# EAGLE board wr841n-pic (EAGLE 6.5.0)
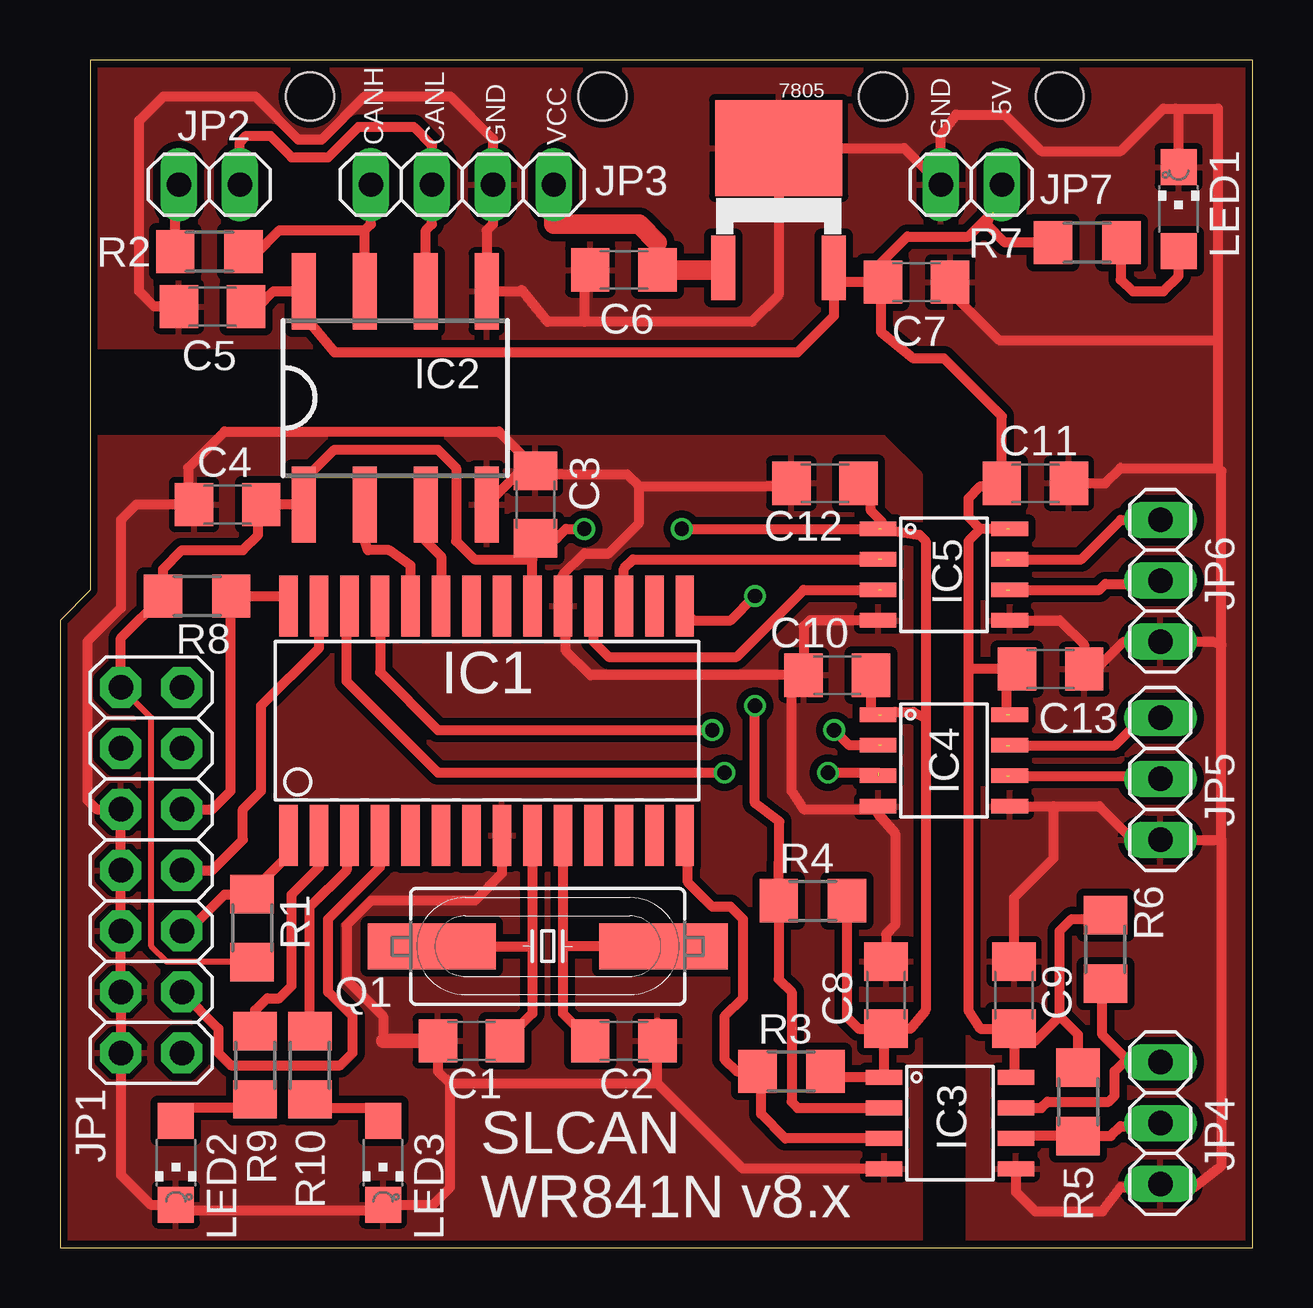
[diagram p0: board, top side]
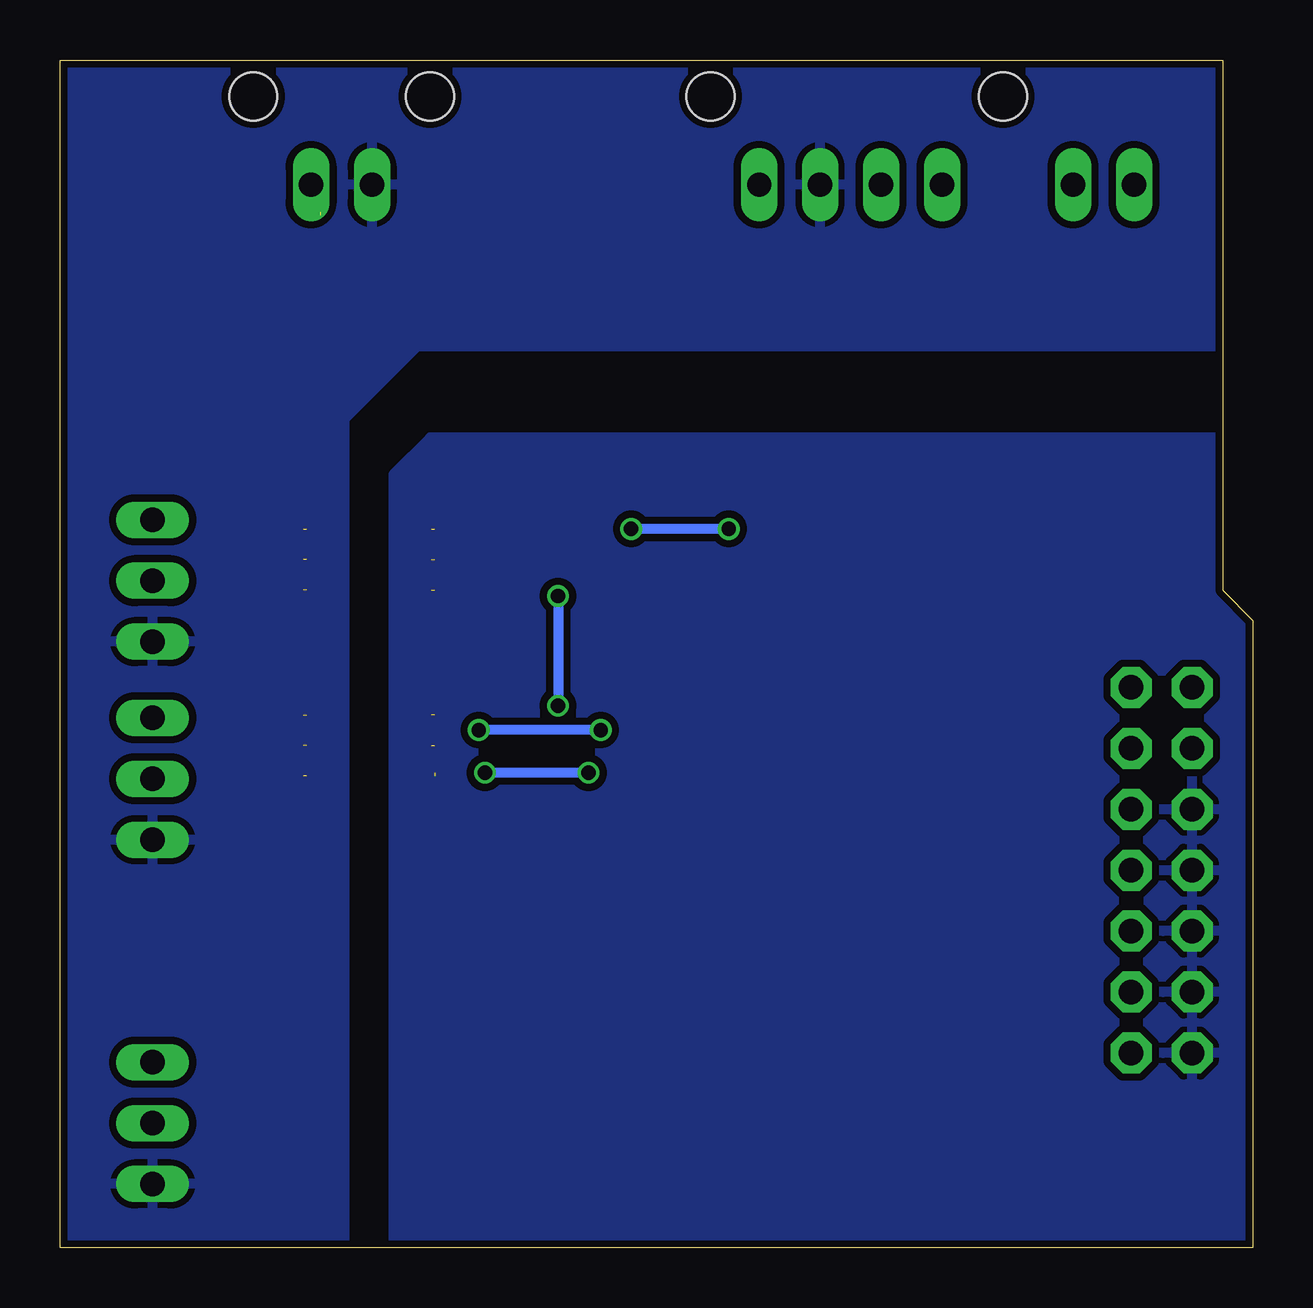
[diagram p1: board, bottom side, seen from below]

Size 49.71 x 49.52 mm. Coordinates in mm from the lower left corner, seen from the top.
Outline: 0,0 49.71,0 49.71,49.52 1.27,49.52 1.27,27.43 0,26.16 0,0
Copper layers (1*16): Top 0.035mm / dielectric 1.5mm / Bottom 0.035mm
Design rules "dirt_cheap_dirty_boards.v1": minimum track width 5mil, minimum drill 12mil, track to track 5mil, track to pad 5mil, pad to pad 5mil, via to via 5mil, smd to smd 0mil, copper to edge 10mil, drill to drill 10mil, minimum pad ring 10mil, minimum via ring 6mil, stop-mask expansion 2mil, vias tented up to drill 25mil, thermal gap 10mil
Holes 2 mm at 34.29,48.01 22.61,48.01 10.41,48.01 41.66,48.01

## Footprints (pad centres in the part's own frame; a part is rotated, then mirrored left to right if it is on the bottom)
7805-DPAK = smd 5.3 x 4: GND 0.1,2.8 | smd 1 x 2.7: IN -2.2,-2.2; OUT 2.4,-2.2
C1206 = smd 1.6 x 1.8: 1 -1.4,0; 2 1.4,0
SO28W = smd 0.762 x 2.54: 1 -7.62,-4.78; 2 -6.35,-4.78; 3 -5.08,-4.78; 4 -3.81,-4.78; 5 -2.54,-4.78; 6 -1.27,-4.78; 7 0,-4.78; 8 1.27,-4.78; 9 2.54,-4.78; 10 3.81,-4.78; 11 5.08,-4.78; 12 6.35,-4.78; 13 7.62,-4.78; 14 8.89,-4.78; 15 8.89,4.78; 16 7.62,4.78; 17 6.35,4.78; 18 5.08,4.78; 19 3.81,4.78; 20 2.54,4.78; 21 1.27,4.78; 22 0,4.78; 23 -1.27,4.78; 24 -2.54,4.78; 25 -3.81,4.78; 26 -5.08,4.78; 27 -6.35,4.78; 28 -7.62,4.78
DUB-R-PDSO-G8 = smd 1 x 3.175: 1 -3.81,-4.445; 2 -1.27,-4.445; 3 1.27,-4.445; 4 3.81,-4.445; 5 3.81,4.445; 6 1.27,4.445; 7 -1.27,4.445; 8 -3.81,4.445
SO8-COOL = smd 0.61 x 1.524: 1 -1.905,-2.743; 2 -0.635,-2.743; 3 0.635,-2.743; 4 1.905,-2.743; 5 1.905,2.743; 6 0.635,2.743; 7 -0.635,2.743; 8 -1.905,2.743
2X07 = drill 1.016 pad 1.708 octagon: 1 -7.62,-1.27; 2 -7.62,1.27; 3 -5.08,-1.27; 4 -5.08,1.27; 5 -2.54,-1.27; 6 -2.54,1.27; 7 0,-1.27; 8 0,1.27; 9 2.54,-1.27; 10 2.54,1.27; 11 5.08,-1.27; 12 5.08,1.27; 13 7.62,-1.27; 14 7.62,1.27
1X02 = drill 1.016 long: 1 -1.27,0; 2 1.27,0
1X04 = drill 1.016 long: 1 -3.81,0; 2 -1.27,0; 3 1.27,0; 4 3.81,0
1X03 = drill 1.016 long: 1 -2.54,0; 2 0,0; 3 2.54,0
CHIPLED_1206 = smd 1.5 x 1.5: A 0,-1.75; C 0,1.75
HC49UP = smd 5.334 x 1.93: 1 -4.826,0; 2 4.826,0
R1206 = smd 1.6 x 1.803: 1 -1.422,0; 2 1.422,0

## Placement (x,y rotation side)
7805  7805-DPAK  [7805-DPAK]  29.84,43.05 0 top
C1  [C1206]  17.14,8.64 0 top
C2  [C1206]  23.5,8.64 180 top
C3  [C1206]  19.81,30.99 270 top
C4  [C1206]  6.99,30.99 0 top
C5  [C1206]  6.35,39.24 0 top
C6  [C1206]  23.5,40.77 0 top
C7  [C1206]  35.69,40.26 180 top
C8  [C1206]  34.42,10.54 270 top
C9  [C1206]  39.75,10.54 270 top
C10  [C1206]  32.38,23.88 0 top
C11  [C1206]  40.64,31.88 180 top
C12  [C1206]  31.88,31.88 0 top
C13  [C1206]  41.27,24.13 180 top
IC1  PIC18F26K80  [SO28W]  17.14,21.97 0 top
IC2  ISO1050  [DUB-R-PDSO-G8]  13.97,35.43 0 top
IC3  ADUM1251  [SO8-COOL]  37.08,5.21 270 top
IC4  ADUM1201  [SO8-COOL]  36.83,20.32 270 top
IC5  ADUM1201  [SO8-COOL]  36.83,28.07 270 top
JP1  [2X07]  3.81,15.75 90 top
JP2  [1X02]  6.22,44.32 0 top
JP3  [1X04]  16.76,44.32 0 top
JP4  [1X03]  45.85,5.21 270 top
JP5  [1X03]  45.85,19.56 270 top
JP6  [1X03]  45.85,27.81 270 top
JP7  [1X02]  37.97,44.32 180 top
LED1  [CHIPLED_1206]  46.61,43.31 0 top
LED2  [CHIPLED_1206]  4.83,3.56 180 top
LED3  [CHIPLED_1206]  13.46,3.56 180 top
Q1  [HC49UP]  20.32,12.57 180 top
R1  [R1206]  8,13.34 270 top
R2  [R1206]  6.22,41.53 180 top
R3  [R1206]  30.48,7.37 0 top
R4  [R1206]  31.37,14.48 0 top
R5  [R1206]  42.42,6.1 90 top
R6  [R1206]  43.56,12.45 90 top
R7  [R1206]  42.8,41.91 180 top
R8  [R1206]  5.71,27.18 180 top
R9  [R1206]  8.13,7.62 90 top
R10  [R1206]  10.41,7.62 90 top

## Library data of the parts
7805 = vreg-7805-dpak
C1-C13 R1-R10 = resistor
IC1 = PIC18F26K80
IC2 = texas; MPN: ISO1050DUBR; OC_FARNELL: 1755712; OC_NEWARK: 14R9899
IC3-IC5 = analog-devices-3
JP1-JP7 = pinhead
LED1-LED3 = led
Q1 = crystal; OC_FARNELL: unknown; OC_NEWARK: unknown

## Nets
+3V3: C3.2 C4.2 C8.2 C10.2 C12.2 IC1.20 IC2.1 IC3.1 IC4.1 IC5.1 JP1.14 R1.2 R3.2 R4.2 R8.2
+5V: 7805.OUT C5.2 C7.2 C9.2 C11.2 C13.2 IC2.8 IC3.8 IC4.8 IC5.8 JP7.1 R5.2 R6.2 R7.2
+18V: 7805.IN C6.2 JP3.4
GND: C1.1 C2.1 C3.1 C4.1 C8.1 C10.1 C12.1 IC1.8 IC1.19 IC2.4 IC3.4 IC4.4 IC5.4 JP1.2 JP1.4 JP1.6 JP1.8 JP1.10 LED2.C LED3.C
GNDA: 7805.GND C5.1 C6.1 C7.1 C9.1 C11.1 C13.1 IC2.5 IC3.5 IC4.5 IC5.5 JP3.3 JP4.3 JP5.3 JP6.3 JP7.2 LED1.C
N$1: C1.2 IC1.9 Q1.2
N$2: C2.2 IC1.10 Q1.1
N$3: IC1.1 JP1.5 R1.1
N$4: IC1.28 JP1.9 R8.1
N$5: IC1.27 JP1.7
N$6: IC1.24 IC2.2
N$7: IC1.23 IC2.3
N$8: IC2.7 JP3.1 R2.1
N$9: JP2.1 R2.2
N$10: IC2.6 JP2.2 JP3.2
N$11: IC3.7 JP4.1 R6.1
N$12: IC3.6 JP4.2 R5.1
N$13: IC1.14 IC3.3 R3.1
N$14: IC1.15 IC3.2 R4.1
N$15: LED1.A R7.1
N$16: IC1.3 R10.2
N$17: IC4.7 JP5.1
N$18: IC4.6 JP5.2
N$19: IC1.17 IC5.2
N$20: IC5.7 JP6.1
N$21: IC5.6 JP6.2
N$22: IC1.18 IC5.3
N$25: IC1.4 JP1.3
N$27: IC1.26 IC4.3
N$28: IC1.25 IC4.2
N$29: IC1.2 R9.2
N$30: LED2.A R9.1
N$31: LED3.A R10.1

## Tracks (layer width: path | path; a pad name or v marks a point on that pad's centre or on a via)
+3V3  (via drill 0.6)  (2 unrouted)
  Top 0.254: JP1.14 3.81,22.1 3.81,12.57 4.45,11.94 8,11.94
  Top 0.406: JP1.14 2.54,25.43 R8.2 4.29,28.3 5.08,29.08 7.62,29.08 8.26,29.72 8.26,30.86 C4.2 IC2.1 10.16,32 11.43,33.27 15.75,33.27 16.51,32.51 16.51,29.46 17.27,28.7 19.69,28.7 C3.2 | IC1.20 19.68,28.95 C3.2 | 34.23,29.97 35.81,29.72 36.07,29.46 36.07,22.1 | 36.07,22.1 36.07,9.91 35.44,9.14 C8.2 | 34.23,22.23 33.78,22.42 C10.2 33.78,22.36 34.8,22.35 35.56,22.35 36.07,22.1 | C3.2 20.7,29.59 21.08,29.97 v21.84,29.97 | v25.91,29.97 34.23,29.97 | 34.23,29.97 34.23,30.29 33.78,30.73 33.78,31.62 C12.2 | 8,11.94 R1.2 | C8.2 34.34,9.06 IC3.1 32.16,7.11 R3.2 | R4.2 32.79,9.63 33.27,9.14 C8.2
  Bottom 0.406: v21.84,29.97 v25.91,29.97
+5V  (3 unrouted)
  Top 0.406: C5.2 8.26,39.24 8.89,39.88 IC2.8 10.16,38.86 11.43,37.34 30.73,37.34 32.26,38.86 32.26,39.32 7805.OUT 32.33,40.26 C7.2 | 38.35,29.97 37.85,30.48 37.85,31.24 38.35,31.75 39.11,31.75 C11.2 39.24,34.67 36.83,37.08 35.56,37.08 34.2,38.19 34.2,39.58 C7.2 | 39.43,29.97 38.35,29.97 | 38.35,29.97 37.85,29.46 37.85,24.13 | 37.85,24.13 C13.2 39.43,24.13 39.43,22.23 | 37.85,24.13 37.85,9.91 38.35,9.14 C9.2 | C7.2 33.78,40.64 35.31,42.16 37.85,42.16 38.86,43.18 | C9.2 39.75,7.19 IC3.8 | R5.2 42.42,8.89 41.66,9.65 | 41.66,9.65 41.66,13.21 42.16,13.72 43.41,13.72 R6.2 | 41.66,9.65 40.64,8.64 39.75,8.64 C9.2 | R7.2 39.37,41.91 38.61,42.67 JP7.1 38.86,43.05
+18V
  Top 0.406: 27.48,40.77 7805.IN | 24.89,41.91 C6.2
  Top 0.813: C6.2 27.48,40.77 | JP3.4 20.57,42.67 24.13,42.67 24.89,41.91
GND
  Top 0.406: C4.1 5.33,30.99 | 5.33,30.99 3.17,30.99 2.54,30.35 2.54,26.67 1.14,25.27 1.14,18.67 1.52,18.29 JP1.10 JP1.8 JP1.6 JP1.4 JP1.2 2.54,3.05 3.78,1.81 LED2.C 5.08,1.55 13.72,1.55 LED3.C 15.52,1.81 16.26,2.54 16.26,6.86 | IC2.4 19.05,32.26 19.81,32.26 | 20.19,32.26 C3.1 | C1.1 15.74,9.15 15.75,7.37 16.26,6.86 | 16.26,6.86 24.89,6.86 | 24.89,6.86 24.89,9.39 C2.1 | IC1.8 18.41,15.62 17.27,14.48 12.95,14.48 11.94,13.46 11.94,11.18 13.46,9.65 13.46,8.64 | 34.1,18.29 30.99,18.29 30.48,19.05 30.48,23.62 30.73,23.87 C10.1 | 34.1,18.29 34.23,18.41 | C10.1 30.98,24.38 30.99,24.13 C10.1 | 24.13,31.75 24.13,30.23 22.86,28.96 21.84,28.96 20.95,28.07 IC1.19 21.08,27.39 21.08,24.89 22.1,23.88 C10.1 | 24.13,31.75 30.6,31.75 | 30.6,31.75 C12.1 | 20.19,32.26 23.62,32.26 24.13,31.75 | 30.6,31.75 30.6,31.37 30.99,31.75 | 5.33,30.99 5.33,32.51 6.86,34.04 18.29,34.04 19.81,32.51 19.81,32.26 | 19.81,32.26 20.19,32.26 | 34.1,18.29 34.09,18.1 34.8,17.27 34.8,13.46 34.42,13.08 C8.1 | IC3.4 28.45,3.3 24.89,6.86 | 34.23,26.16 31.24,26.16 30.99,25.91 30.99,24.13 C10.1
  Top 0.61: 13.46,8.64 C1.1
  pour Top (isolate 0.305): -0.51,-0.51 -0.51,26.42 0.76,27.94 0.76,33.78 34.29,33.78 35.81,32.26 35.81,-0.51
  pour Bottom (isolate 0.305): -0.51,-0.51 -0.51,26.67 0.76,27.94 0.76,33.78 34.29,33.78 35.81,32.26 35.81,-0.51
GNDA
  Top 0.406: 21.84,38.61 28.83,38.61 29.95,39.72 7805.GND 35.17,45.85 JP7.2 36.7,46.35 37.34,47.24 39.37,47.24 40.89,45.72 44.2,45.72 45.97,47.5 46.48,47.5 | 21.84,38.61 20.32,38.61 19.24,39.94 19.17,39.88 IC2.5 17.78,42.42 18.03,42.67 JP3.3 18.03,46.23 16.26,48.01 12.7,48.01 10.92,46.23 9.91,46.23 8.13,48.01 4.32,48.01 3.3,46.99 3.3,39.88 3.94,39.24 C5.1 | 48.39,17.02 JP5.3 44.7,17.02 43.31,18.41 41.4,18.41 | 39.43,26.16 41.66,26.16 42.67,25.15 C13.1 43.18,24.13 44.32,25.27 JP6.3 48.01,25.27 48.39,25.15 | 46.48,47.5 48.26,47.5 48.26,37.85 | 41.91,31.75 C11.1 43.56,31.88 44.2,32.51 48.26,32.51 | 39.43,18.41 41.4,18.41 | C7.1 36.58,40.38 39.12,37.85 48.26,37.85 | LED1.C 46.61,47.37 46.48,47.5 | 48.39,17.02 48.39,25.15 | 48.39,25.15 48.39,32.38 48.26,32.51 | IC3.5 39.83,2.34 40.64,1.52 43.43,1.52 44.2,2.54 45.97,2.54 | JP4.3 45.97,2.54 | 45.97,2.54 47.24,2.54 48.39,3.43 48.39,17.02 | C9.1 39.75,14.61 41.4,16.26 41.4,18.41 | 48.26,32.51 48.26,37.85 | C6.1 21.84,40.52 21.84,38.61
  pour Top (isolate 0.305): 1.27,49.53 1.27,37.59 32.77,37.59 34.8,37.59 37.85,34.54 37.85,-0.51 50.04,-0.51 50.04,49.78 1.27,49.78
  pour Bottom (isolate 0.305): 1.27,37.59 1.27,49.78 50.04,49.78 50.04,-0.51 37.85,-0.51 37.85,34.54 34.8,37.59
N$1
  Top 0.406: IC1.9 19.68,12.57 | 19.68,12.57 19.68,9.78 C1.2 | Q1.2 19.68,12.57
N$2
  Top 0.406: IC1.10 20.95,12.57 | 20.95,12.57 20.95,9.78 C2.2 | Q1.1 20.95,12.57
N$3
  Top 0.406: IC1.1 9.4,17.83 9.4,16.26 8,14.86 R1.1 7.98,14.73 6.86,14.73 5.33,13.21 JP1.5
N$4
  Top 0.406: JP1.9 6.35,18.29 7.11,19.05 7.11,26.7 R8.1 9.19,27.18 IC1.28
N$5
  Top 0.406: JP1.7 6.35,15.75 7.62,17.02 7.62,18.29 8.38,19.05 8.38,22.61 10.79,25.02 IC1.27
N$6
  Top 0.406: IC1.24 14.61,28.45 13.72,29.08 12.83,29.08 12.7,29.46 IC2.2
N$7
  Top 0.406: IC2.3 15.24,29.46 15.88,28.83 IC1.23
N$8
  Top 0.406: IC2.7 12.7,42.42 | 12.7,42.42 12.95,42.67 JP3.1 | R2.1 8.13,41.4 9.14,42.42 12.7,42.42
N$9
  Top 0.406: R2.2 4.8,43.16 JP2.1
N$10
  Top 0.406: IC2.6 15.24,42.42 15.49,42.67 JP3.2 15.49,45.97 14.73,46.74 12.45,46.74 11.18,45.47 9.65,45.47 8.76,46.35 7.75,46.35 7.49,46.1 JP2.2
N$11
  Top 0.406: IC3.7 40.89,5.84 41.15,6.1 43.69,6.1 43.94,6.35 43.94,7.37 44.32,7.75 JP4.1 44.58,7.75 43.43,8.89 43.43,10.9 R6.1
N$12
  Top 0.406: IC3.6 39.93,4.67 R5.1 43.79,4.67 44.2,5.08 45.72,5.08 JP4.2
N$13
  Top 0.406: IC1.14 26.16,17.83 26.16,15.24 27.18,14.22 27.94,14.22 28.45,13.72 28.45,10.41 27.69,9.65 27.69,7.87 28.19,7.37 R3.1 | 29.11,7.37 R3.1 | IC3.3 30.23,4.57 29.21,5.59 29.21,7.21 R3.1
N$14  (via drill 0.6)
  Top 0.406: IC1.15 26.04,26.54 26.42,26.16 27.94,26.16 v28.96,27.18 | v28.96,22.61 28.96,18.54 29.97,17.78 R4.1 29.95,11.2 30.48,10.67 30.48,6.1 30.73,5.84 IC3.2
  Bottom 0.406: v28.96,27.18 v28.96,22.61
N$15
  Top 0.406: R7.1 44.19,40.36 44.7,39.88 45.97,39.88 46.61,40.51 LED1.A
N$16
  Top 0.406: R10.2 10.41,14.22 11.94,15.75 11.94,17.95 IC1.3
N$17  (1 unrouted)
  Top 0.406: 39.43,20.95 43.94,20.95 45.09,22.1 JP5.1
N$18  (1 unrouted)
  Top 0.406: 39.43,19.68 45.85,19.68 45.97,19.56 JP5.2
N$19  (1 unrouted)
  Top 0.406: IC1.17 23.5,28.32 23.88,28.7 34.23,28.7
N$20  (1 unrouted)
  Top 0.406: 39.43,28.7 42.55,28.7 44.2,30.35 JP6.1
N$21  (1 unrouted)
  Top 0.406: 39.43,27.43 43.31,27.43 43.56,27.69 45.21,27.69 45.72,27.81 JP6.2
N$22  (1 unrouted)
  Top 0.406: IC1.18 22.23,25.27 22.86,24.64 28.19,24.64 30.99,27.43 34.23,27.43
N$25
  Top 0.406: JP1.3 6.6,9.14 6.6,8.13 7.11,7.62 11.68,7.62 12.19,8.13 12.19,9.65 11.18,10.67 11.18,13.72 13.34,15.88 IC1.4
N$27  (via drill 0.6)  (1 unrouted)
  Top 0.406: v27.69,19.81 15.75,19.81 11.94,23.62 11.94,27.39 IC1.26 | v32,19.81 34.1,19.81 34.23,19.68
  Bottom 0.406: v32,19.81 v27.69,19.81
N$28  (via drill 0.6)  (1 unrouted)
  Top 0.406: IC1.25 13.34,24 15.75,21.59 v27.18,21.59 | 34.23,20.95 32.89,20.95 v32.26,21.59
  Bottom 0.406: v27.18,21.59 v32.26,21.59
N$29
  Top 0.406: R9.2 8.13,9.91 8.64,10.41 9.14,10.41 9.65,10.92 9.65,14.73 10.79,15.88 IC1.2
N$30
  Top 0.406: R9.1 7.77,5.84 5.08,5.84 4.83,5.59 LED2.A
N$31
  Top 0.406: R10.1 10.54,5.81 10.41,5.84 13.21,5.84 LED3.A

## Text on the board
tNames: 5V | CANH | CANL | GND | VCC | GND | SLCAN / WR841N v8.x